# Altium PCB Bpod_Controller_v5.PcbDoc
Units mm, origin at the board's own origin, x right, y up, seen from the top; angles counter-clockwise.
Board outline 222.25 x 73.66 mm, 4 copper layers (Top Side, Inner Layer 1, Inner Layer 2, Bottom Side), stack 1.59 mm thick; 28 components, 56 nets, 210 pads, 9 vias.
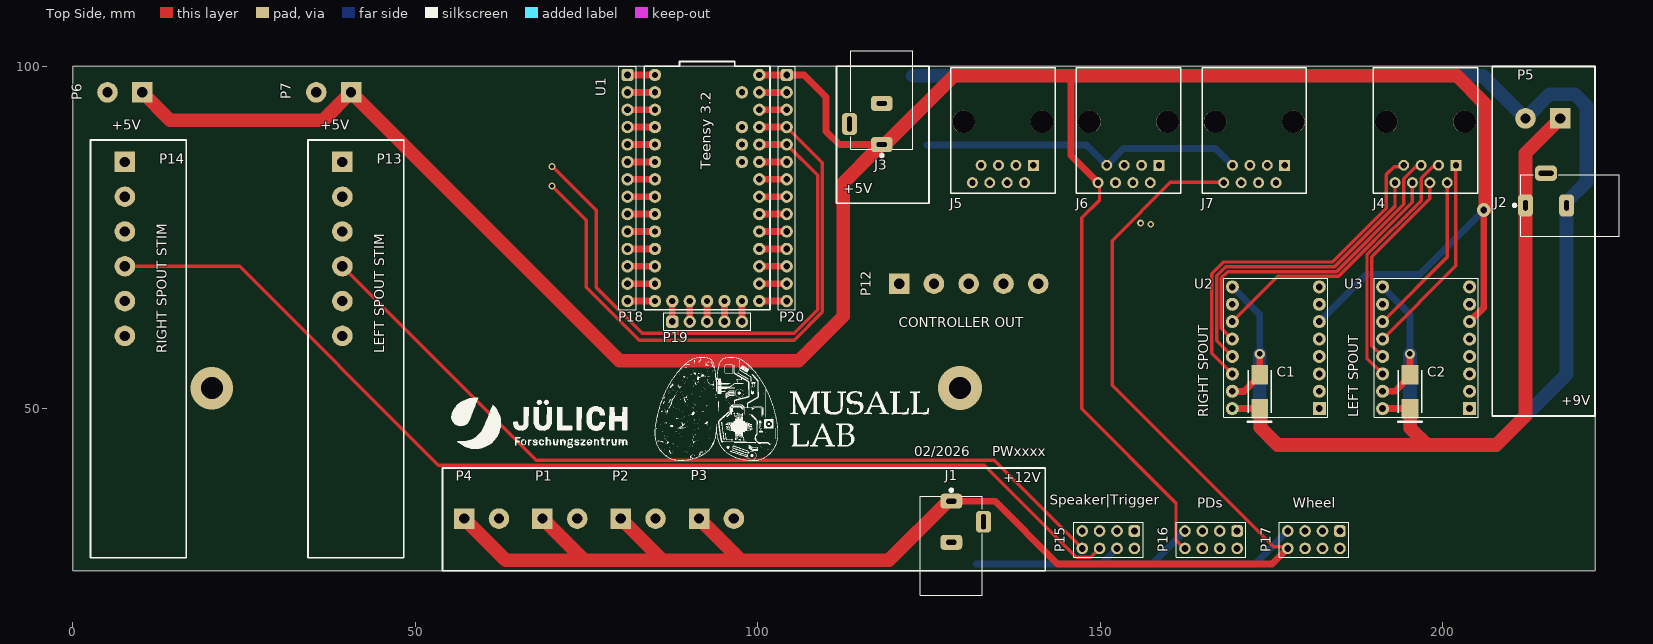
[diagram p0: Top Side view]
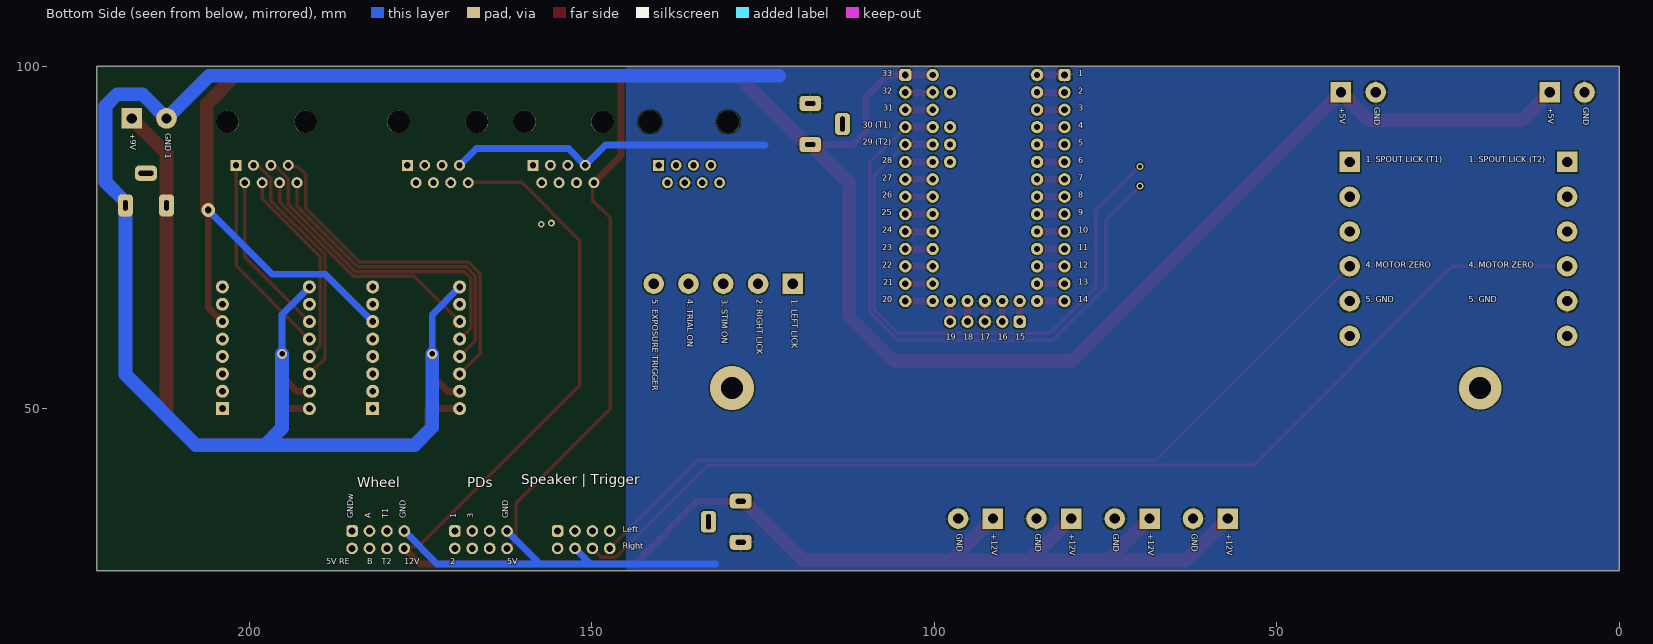
[diagram p1: Bottom Side view, seen from below]
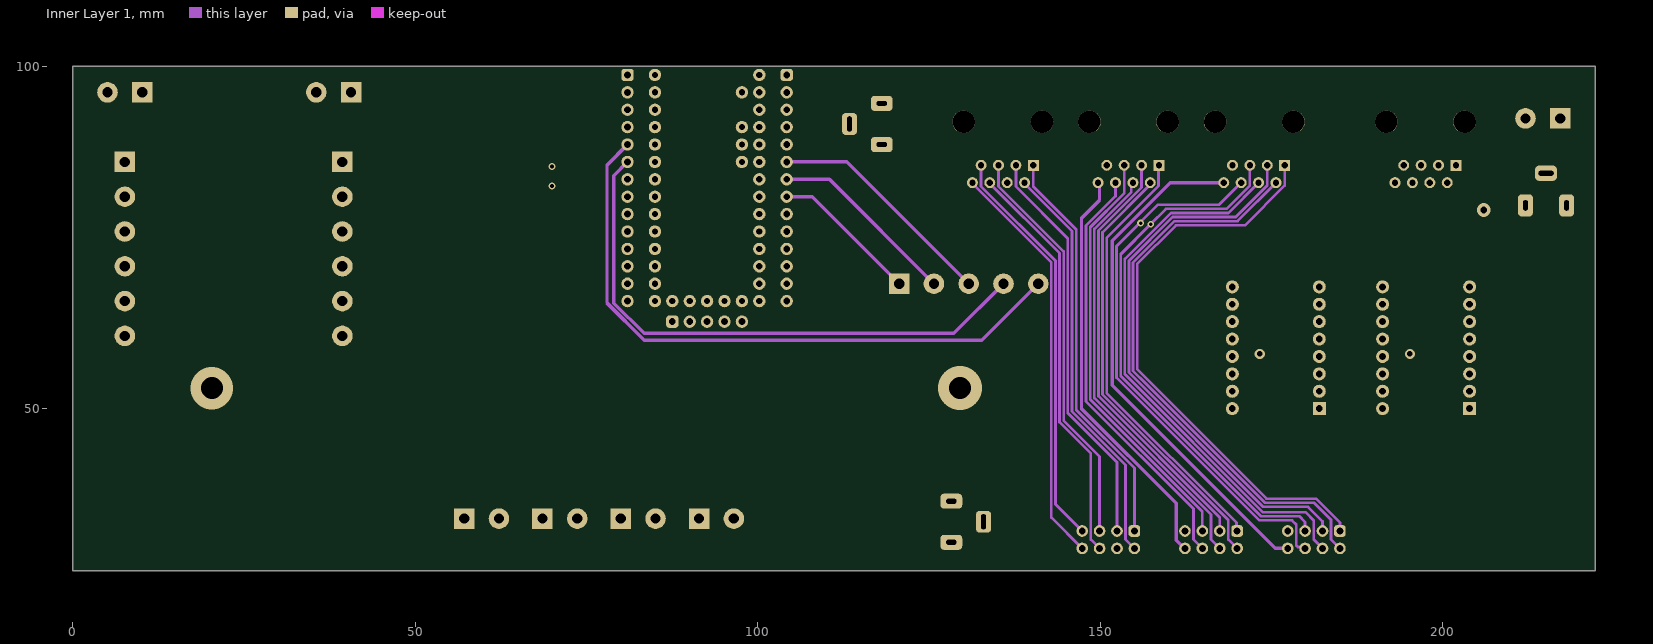
[diagram p2: Inner Layer 1]
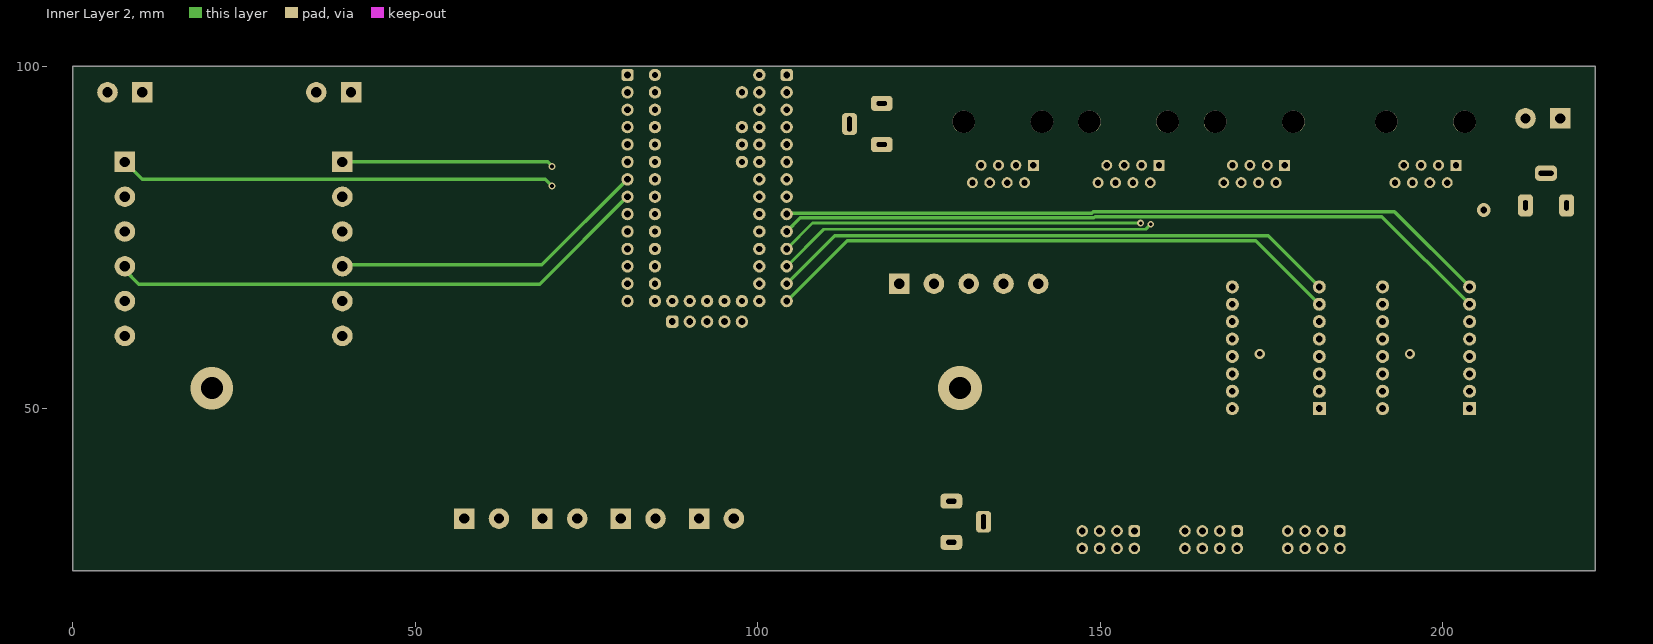
[diagram p3: Inner Layer 2]
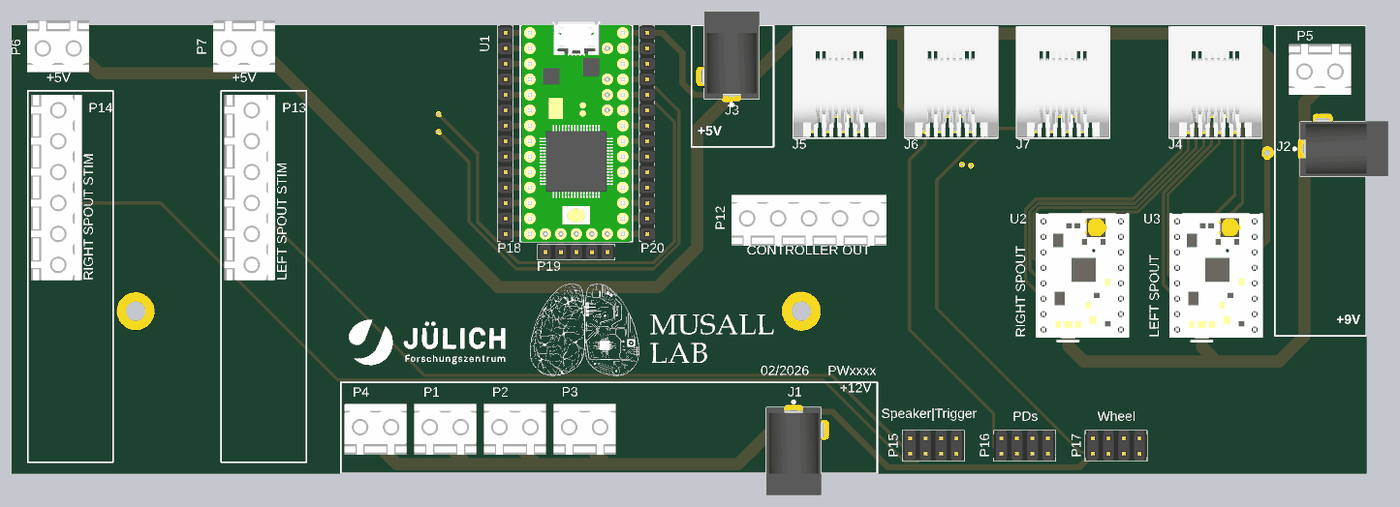
[diagram p4: 3D render of the assembled board from above, using the file's embedded part models]

## Layer stack, top to bottom
Top Solder: solder mask 0.015, WE-SM-0001, Dk 3.5
Top Side: signal copper 0.035
Dielectric 1: prepreg 0.37, WE-PP-0013, Dk 4.5
Inner Layer 1: signal copper 0.035
Core 1: core 0.71, WE-CO-0014, Dk 4.7
Inner Layer 2: signal copper 0.035
Dielectric 2: prepreg 0.37, WE-PP-0013, Dk 4.5
Bottom Side: signal copper 0.035
Bottom Solder: solder mask 0.015, WE-SM-0001, Dk 3.5

## Board outline
0,26.34 0,100 222.25,100 222.25,26.34

## Design rules (kind name [scope] priority, off if disabled: settings)
AssemblyTestPointUsage [All] p1: isadvanced=TRUE
AssemblyTestpoint [All] p1: isadvanced=TRUE testpointundercomponent=TRUE minsize=1.016 maxsize=2.54 preferedsize=1.524 minholesize=0 maxholesize=1.016 preferedholesize=0.813 testpointgrid=0.025 usegrid=TRUE gridtolerance=0 allowsidetop=TRUE allowsidebottom=TRUE
Clearance Clearance_1 [(ExistsOnLayer('Inner Layer 1') Or ExistsOnLayer('Inner Layer 2')) vs (ExistsOnLayer('Inner Layer 1') Or ExistsOnLayer('Inner Layer 2'))] p1: gap=0.2 ignorepadtopadclearanceinfootprint=FALSE sourcerule=41 cellrowname=All cellrowtype=0 cellcolname=All cellcoltype=0 innerlayers=TRUE
Clearance Clearance_2 [(ExistsOnLayer('Top Side') Or ExistsOnLayer('Bottom Side')) vs (ExistsOnLayer('Top Side') Or ExistsOnLayer('Bottom Side'))] p2: gap=0.2 ignorepadtopadclearanceinfootprint=FALSE sourcerule=41 cellrowname=All cellrowtype=0 cellcolname=All cellcoltype=0 outerlayers=TRUE
Clearance [All] p3: gap=0.254 ignorepadtopadclearanceinfootprint=FALSE ismatrix=TRUE
ComponentClearance [All] p1: isadvanced=TRUE gap=0.254 collisioncheckmode=3 verticalgap=0.254 showdistances=FALSE
DiffPairsRouting [All] p1: maxlimit=0.5 minlimit=0.5 mostfreqgap=0.5 toplayer_minwidth=0.381 toplayer_maxwidth=0.381 toplayer_prefwidth=0.381 midlayer1_minwidth=0.381 midlayer1_maxwidth=0.381 midlayer1_prefwidth=0.381 midlayer2_minwidth=0.381 midlayer2_maxwidth=0.381 midlayer2_prefwidth=0.381 bottomlayer_minwidth=0.381 bottomlayer_maxwidth=0.381 bottomlayer_prefwidth=0.381 maxuncoupledlength=12.7
FabricationTestPointUsage [All] p1: isadvanced=TRUE valid=0 allowmultiple=FALSE
FabricationTestpoint [All] p1: isadvanced=TRUE side=3 testpointundercomponent=TRUE minsize=1.016 maxsize=2.54 preferedsize=1.524 minholesize=0 maxholesize=1.016 preferedholesize=0.813 testpointgrid=0.025 allowsidetop=TRUE allowsidebottom=TRUE usegrid=TRUE gridtolerance=0
FanoutControl Fanout_BGA [IsBGA] p1: isadvanced=TRUE bgadir=Out bgaviamode=Centered fanoutstyle=Auto fanoutdirection=Alternating viagrid=0.025 // Fanout_BGA (Default Rule)
FanoutControl Fanout_LCC [IsLCC] p2: isadvanced=TRUE bgadir=Out bgaviamode=Centered fanoutstyle=Auto fanoutdirection=Alternating viagrid=0.025 // Fanout_LCC (Default Rule)
FanoutControl Fanout_SOIC [IsSOIC] p3: isadvanced=TRUE bgadir=Out bgaviamode=Centered fanoutstyle=Auto fanoutdirection=Alternating viagrid=0.025 // Fanout_SOIC (Default Rule)
FanoutControl Fanout_Small [(CompPinCount < 5)] p4: isadvanced=TRUE bgadir=Out bgaviamode=Centered fanoutstyle=Auto fanoutdirection=OutThenIn viagrid=0.025 // Fanout_Small (Default Rule)
FanoutControl Fanout_Default [All] p5: isadvanced=TRUE bgadir=Out bgaviamode=Centered fanoutstyle=Auto fanoutdirection=Alternating viagrid=0.025 // Fanout_Default (Default Rule)
Height [All] p1: isadvanced=TRUE minheight=0 maxheight=25.4 prefheight=12.7
HoleSize [All] p1: isadvanced=TRUE absolutevalues=TRUE maxlimit=5 minlimit=0.05 maxpercent=80.000 minpercent=20.000
HoleToHoleClearance [All] p1: isadvanced=TRUE gap=0.2 allowstackedmicrovias=TRUE
LayerPairs [All] p1: isadvanced=TRUE enforce=TRUE
MinimumSolderMaskSliver [All] p1: isadvanced=TRUE minsoldermaskwidth=0.2
NetAntennae [All] p1: isadvanced=TRUE netantennaetolerance=0
PasteMaskExpansion [All] p1: isadvanced=TRUE expansion=0
PlaneClearance [All] p1: isadvanced=TRUE clearance=0.508
PlaneConnect [All] p1: isadvanced=TRUE planeconnectstyle=Relief reliefexpansion=0.508 reliefentries=4 reliefconductorwidth=0.254 reliefairgap=0.254
PolygonConnect [All] p1: connectstyle=Relief reliefconductorwidth=0.3 reliefentries=4 polygonreliefangle="90 Angle" airgapwidth=0.3
RoutingCorners [All] p1: isadvanced=TRUE cornerstyle=45-Degree minsetback=2.54 maxsetback=2.54
RoutingPriority [All] p1: isadvanced=TRUE routingpriority=0
RoutingVias RoutingViaStyle_1 [All] p1: isadvanced=TRUE holewidth=0.8 width=1.6 viastyle="Through Hole" minholewidth=0.5 minwidth=0.8 maxholewidth=4 maxwidth=5
RoutingVias [All] p2: holewidth=0.8 width=1.6 viastyle="Through Hole" minholewidth=0.8 minwidth=1.6 maxholewidth=0.8 maxwidth=1.6
ShortCircuit [All] p1: isadvanced=TRUE allowed=FALSE
SilkToSilkClearance [All] p1: isadvanced=TRUE silktosilkclearance=0.1
SilkToSolderMaskClearance [IsPad] p1: isadvanced=TRUE minsilkscreentomaskgap=0.1 clearancetoexposedcopper=TRUE
SolderMaskExpansion [All] p1: isadvanced=TRUE expansion=0.102 istentingtop=FALSE
SupplyNets "Schematic Supply Nets_3" [InNet('+12V')] p1: isadvanced=TRUE voltage=0.000
SupplyNets "Schematic Supply Nets_2" [InNet('+9V')] p2: isadvanced=TRUE voltage=0.000
SupplyNets "Schematic Supply Nets_1" [InNet('+5V')] p3: isadvanced=TRUE voltage=0.000
SupplyNets "Schematic Supply Nets" [InNet('GND')] p4: isadvanced=TRUE voltage=0.000
UnRoutedNet [All] p1: isadvanced=TRUE
UnpouredPolygon [All] p1: isadvanced=TRUE
Width [All] p1: maxlimit=5 minlimit=0.2 preferedwidth=0.5 minimp=50.000000 maximp=50.000000 favimp=50.000000
3 further rules are at their usual default settings.

## Components (designator, comment, footprint, x,y, rotation, side; value= is the part's Value field where it differs from the comment)
C1 "TAJC107K016RNJ" AVX-TAJ-C-2_M 173.291,52.485 r90 top locked value=100µF
C2 "TAJC107K016RNJ" AVX-TAJ-C-2_M 195.231,52.485 r90 top locked value=100µF
J1 "PJ-102AH" CUI_PJ-102AH 128.271,30 r270 top locked
J2 "PJ-102AH" CUI_PJ-102AH 218.591,79.68 r0 top locked
J3 "PJ-102AH" CUI_PJ-102AH 118.111,95.07 r90 top locked
J4 "5569118-1" 5569118-1-Footprint-1 203.206,91.89 r180 top
J5 "5569118-1" 5569118-1-Footprint-1 141.506,91.89 r180 top
J6 "5569118-1" 5569118-1-Footprint-1 159.856,91.89 r180 top
J7 "5569118-1" 5569118-1-Footprint-1 178.206,91.89 r180 top
P1 "282825-2" 282825-4-Footprint-1#1 68.581,33.96 r90 top locked
P2 "282825-2" 282825-4-Footprint-1#1 80.011,33.96 r90 top locked
P3 "282825-2" 282825-4-Footprint-1#1 91.441,33.96 r90 top locked
P4 "282825-2" 282825-4-Footprint-1#1 57.151,33.96 r90 top locked
P5 "282825-2" 282825-4-Footprint-1#1 217.171,92.38 r270 top locked
P6 "282825-2" 282825-4-Footprint-1#1 10.16,96.19 r270 top locked
P7 "282825-2" 282825-4-Footprint-1#1 40.641,96.19 r270 top locked
P12 "282825-5" 282825-4-Footprint-1#2 120.651,68.25 r90 top locked
P13 "282825-6" 282825-4-Footprint-1#3 39.371,86.03 r0 top locked
P14 "282825-6" 282825-4-Footprint-1#3 7.621,86.03 r0 top locked
P15 "SL 2 025 8 G" "SL 2 025 2 G-Footprint-1" 155,32.15 r270 top
P16 "SL 2 025 8 G" "SL 2 025 2 G-Footprint-1" 170,32.15 r270 top
P17 "SL 2 025 8 G" "SL 2 025 2 G-Footprint-1" 185,32.15 r270 top
P18 "SL_1_025_14_ G" "SL_1_025_14_ G" 81,98.73 r0 top
P19 "SL_1_025_5_ G" "SL_1_025_5_ G" 87.54,62.71 r90 top
P20 "SL_1_025_14_ G" "SL_1_025_14_ G" 104.24,98.73 r0 top
U1 "Teensy 3.2" "New footprint 1" 85,98.73 r0 top locked
U2 "DRV8834" "DRV8825 STEPPER MOTOR DRIVER CARRIER-Footprint-1" 181.991,50.01 r180 top locked
U3 "DRV8834" "DRV8825 STEPPER MOTOR DRIVER CARRIER-Footprint-1" 203.931,50.01 r180 top locked

## Footprints (in the part's own frame and the unit in brackets; to place one, negate y for a bottom-side part, rotate by r counter-clockwise, add the part's x,y. Pads: shape width x height; smd on the part's side, far side on the other; paste and mask are expansions set on the pad)
282825-4-Footprint-1#1 [mm]
  rect 3x3 hole 1.5 paste-2539.97: 1(0,0)
  round 3 hole 1.5 paste-2539.97: 2(0,-5.08)
  body extent -4.5,-7.62 3.85,2.54, height 12
282825-4-Footprint-1#2 [mm]
  rect 3x3 hole 1.5 paste-2539.97: 1(0,0)
  round 3 hole 1.5 paste-2539.97: 2(0,-5.08) 3(0,-10.16) 4(0,-15.24) 5(0,-20.32)
  body extent -4.5,-22.86 3.85,2.54, height 12
282825-4-Footprint-1#3 [mm]
  rect 3x3 hole 1.5 paste-2539.97: 1(0,0)
  round 3 hole 1.5 paste-2539.97: 2(0,-5.08) 3(0,-10.16) 4(0,-15.24) 5(0,-20.32) 6(0,-25.4)
  body extent -4.5,-27.94 3.85,2.54, height 12
5569118-1-Footprint-1 [mm]
  rect 1.6x1.6 hole 0.9: 1(1.27,6.35)
  round 1.6 hole 0.9: 2(2.54,8.89) 3(3.81,6.35) 4(5.08,8.89) 5(6.35,6.35) 6(7.62,8.89) 7(8.89,6.35) 8(10.16,8.89)
  round 3.3 hole 3.3: X(0,0) Y(11.43,0)
  silkscreen extent -1.91,-7.87 13.33,10.42, body extent -1.91,-8 13.33,10.26, height 12.6
AVX-TAJ-C-2_M [mm] "Molded Capacitor, 2-Leads, Body 6.2x3.4mm, IPC Low Density"
  rect 2.85x2.45 smd: 1(-2.475,0) 2(2.475,0)
  silkscreen extent -4.4,-1.7 3.1,1.7, body extent -3.32,-1.7 3.32,1.7, height 2.8
CUI_PJ-102AH [mm]
  rrect50% 2.2x3.2 hole 0.7 slot 1.5 at 90 deg: 1(-6.5,0) 2(-0.5,0)
  rrect50% 3.2x2.2 hole 0.7 slot 2.2 at 0 deg: 3(-3.5,4.7)
  silkscreen extent -8.3,-4.5 7.2,4.5, body extent -7.2,-4.5 7.2,4.9, height 11
"DRV8825 STEPPER MOTOR DRIVER CARRIER-Footprint-1" [mm]
  rect 1.9x1.9 hole 1: 1(0,0)
  round 1.9 hole 1: 2(0,-2.54) 3(0,-5.08) 4(0,-7.62) 5(0,-10.16) 6(0,-12.7) 7(0,-15.24) 8(0,-17.78) 9(12.7,-17.78) 10(12.7,-15.24) 11(12.7,-12.7) 12(12.7,-10.16) 13(12.7,-7.62) 14(12.7,-5.08) 15(12.7,-2.54) 16(12.7,0)
  silkscreen extent -1.27,-19.05 13.93,1.27, body extent -1.25,-19.05 13.99,1.28, height 13.72
"New footprint 1" [mm]
  round 1.8 hole 0.9 paste-2539.97: 1(0,0) 2(0,-2.54) 3(0,-5.08) 4(0,-7.62) 5(0,-10.16) 6(0,-12.7) 7(0,-15.24) 8(0,-17.78) 9(0,-20.32) 10(0,-22.86) 11(0,-25.4) 12(0,-27.94) 13(0,-30.48) 14(0,-33.02) 15(2.54,-33.02) 16(5.08,-33.02) 17(7.62,-33.02) 18(10.16,-33.02) 19(12.7,-33.02) 20(15.24,-33.02) 21(15.24,-30.48) 22(15.24,-27.94) 23(15.24,-25.4) 24(15.24,-22.86) 25(15.24,-20.32) 26(15.24,-17.78) 27(15.24,-15.24) 28(15.24,-12.7) 29(15.24,-10.16) 30(15.24,-7.62) 31(15.24,-5.08) 32(15.24,-2.54) 33(15.24,0) 34(12.7,-2.54) 35(12.7,-7.62) 36(12.7,-10.16) 37(12.7,-12.7)
  silkscreen extent -1.57,-34.27 16.81,1.95, body extent -1.27,-34.29 16.51,1.97, height 14.85
"SL 2 025 2 G-Footprint-1" [mm]
  rrect50% 1.7x1.7 hole 1: 1(0,0)
  round 1.7 hole 1: 2(2.54,0) 3(0,-2.54) 4(2.54,-2.54) 5(0,-5.08) 6(2.54,-5.08) 7(0,-7.62) 8(2.54,-7.62)
  silkscreen extent -1.27,-8.89 3.81,1.27, body extent -1.23,-8.89 3.77,1.27, height 8.2
"SL_1_025_5_ G" [mm]
  rrect50% 1.8x1.8 hole 1: 1(0,0)
  round 1.8 hole 1: 2(0,-2.54) 3(0,-5.08) 4(0,-7.62) 5(0,-10.16)
  silkscreen extent -1.27,-11.43 1.27,1.27, body extent -1.25,-11.43 1.25,1.27, height 9.8
"SL_1_025_14_ G" [mm]
  rrect50% 1.8x1.8 hole 1: 1(0,0)
  round 1.8 hole 1: 2(0,-2.54) 3(0,-5.08) 4(0,-7.62) 5(0,-10.16) 6(0,-12.7) 7(0,-15.24) 8(0,-17.78) 9(0,-20.32) 10(0,-22.86) 11(0,-25.4) 12(0,-27.94) 13(0,-30.48) 14(0,-33.02)
  silkscreen extent -1.27,-34.29 1.27,1.27, body extent -1.25,-34.29 1.25,1.27, height 9.8

## Part data
C1 C2: library part CMP-001-00046-9, "Standard Tantalum, 100 uF, +/- 10%, 16 V, -55 to 125 degC, 2312 (6032 Metric), RoHS, Tape and Reel", Capacitor Type=Tantalum, Case/Package=2412, Manufacturer=AVX, Max Operating Temperature=125°C, Min Operating Temperature=-55°C, Package Description="2-Pin Surface Mount Device, Body 6 x 3.25 mm", Package Quantity=500, Package Reference=TAJ-C-2, Resistance=1Ohm, Tolerance=10%, Voltage Rating=16V, Datasheet URL=http://datasheets.avx.com/TAJ.pdf, Datasheet Version=Feb-16, ESR=1Ohm, Manufacturer URL=http://www.avx.com/, Mounting Technology=SM, Packaging=TapeandReel, RoHS Compliant=True
J1 J2 J3: library part CMP-00027-00002-5, "12V, 2.5A, 2mm Dia", Mounting Technology=Board, Pins=3, RoHS Compliant=Yes, user=IBI-TAE
J4 J5 J6 J7: library part CMP-002-00096-6, "Telecom and Datacom Connector, 8 Contact(s), Female, Right Angle, Solder Terminal, Locking, Jack", Case/Package=RJ45, Max Operating Temperature=85°C, Min Operating Temperature=-40°C, Connector Type="TELECOM AND DATACOM CONNECTOR", Mounting Technology=Panel,Board, Pins=8, RoHS Compliant=Yes, user=IBI-TAE
P1 P2 P3 P4 P5 P6 P7: library part CMP-002-00093-3, "Strip Terminal Block, 15A, 1 Row(s), 1 Deck(s)", Max Current Rating=15A, Voltage Rating=300V, Connector Type="Pluggable Terminal Block", Gender=male, Mounting Technology=Board, Pins=4, RoHS Compliant=Yes, user=IBI-TAE
P12: library part CMP-002-00091-4, "Strip Terminal Block, 15A, 1 Row(s), 1 Deck(s)", Max Current Rating=15A, Voltage Rating=300V, Connector Type="Pluggable Terminal Block", Gender=male, Mounting Technology=Board, Pins=5, RoHS Compliant=Yes, user=IBI-TAE
P13 P14: library part CMP-002-00092-4, "Strip Terminal Block, 15A, 1 Row(s), 1 Deck(s)", Max Current Rating=15A, Voltage Rating=300V, Connector Type="Pluggable Terminal Block", Gender=male, Mounting Technology=Board, Pins=6, RoHS Compliant=Yes, user=IBI-TAE
P15 P16 P17: library part CMP-002-00101-2, "Fischer  SL 2 025 8 G, Stiftleiste, 2 Reiheb, 8 Pole, vergoldet", Max Current Rating=3A, Voltage Rating=300V, Connector Type="BOARD CONNECTOR", Contact Finish - Mating=GOLD, Contact Finish - Termination=GOLD, Contact Gender=Male, Gender=male, Mounting Style=STRAIGHT, Mounting Technology=Board, Number of Contacts=8, Number of Rows Loaded=2, Pins=6, RoHS Compliant=Yes, Terminal Pitch=2.54mm, user=IBI-TAE
P18 P20: library part CMP-002-00107-2, "Fischer SL_1_025_14_ G, Stiftleiste, 1 Reiheb, 14 Pole, vergoldet", Max Current Rating=3A, Voltage Rating=300V, Connector Type="BOARD CONNECTOR", Contact Finish - Mating=GOLD, Contact Finish - Termination=GOLD, Contact Gender=Male, Gender=male, Mounting Style=STRAIGHT, Mounting Technology=Board, Number of Contacts=14, Number of Rows Loaded=1, Pins=14, RoHS Compliant=Yes, Terminal Pitch=2.54mm, user=IBI-TAE
P19: library part CMP-002-00106-1, "Fischer SL_1_025_5_ G, Stiftleiste, 1 Reiheb, 5 Pole, vergoldet", Max Current Rating=3A, Voltage Rating=300V, Connector Type="BOARD CONNECTOR", Contact Finish - Mating=GOLD, Contact Finish - Termination=GOLD, Contact Gender=Male, Gender=male, Mounting Style=STRAIGHT, Mounting Technology=Board, Number of Contacts=5, Number of Rows Loaded=1, Pins=5, RoHS Compliant=Yes, Terminal Pitch=2.54mm, user=IBI-TAE
U1: library part CMP-00000-6, "Development Boards & Kits, ARM Teensy 3.2 and header", user=IBI-TAE
U2 U3: library part CMP-00024-00007-1, "DRV8834 Low-Voltage Stepper Motor Driver Carrier", Continuous current per phase=1,5A, Max current per phase=2A, Max Supply Voltage=10,8V, Min Supply Voltage=2,5V, Pins=16, user=IBI-TAE, website=https://www.pololu.com/product/2134

## Via types
v1: diameter 1.5, hole 0.8, Top Side to Bottom Side, 2 vias
v2: diameter 1, hole 0.5, Top Side to Bottom Side, 2 vias
v3: diameter 1, hole 0.6, Top Side to Bottom Side, 2 vias
v4: diameter 2, hole 1, Top Side to Bottom Side, 1 vias
v5: diameter 6.4, hole 3.2, Top Side to Bottom Side, 1 vias
v6: diameter 6.2, hole 3.2, Top Side to Bottom Side, 1 vias

## Nets (pads, with @x,y where several pads share a name; then routed paths per layer and width w, separated by ;. In a path a pad name is that pad's centre, name@x,y a point inside that pad or via, vN(x,y) a via of type N, cw(c..) or ccw(c..) an arc to the next point about the centre after c; other vN are vias at no path point)
+5V: J3.1 J6.8 P6.1 P7.1 P16.8 P20.1 U1.33 U2.6 U3.6 | length 472.6
  Top Side w0.5: J6.8 149.9,82.796 149.9,80.45 147.3,77.85 147.3,49.975 161.075,36.2 161.075,30.8 162,29.875 P16.8@162.325,29.875
  Top Side w1: U1.33 P20.1 106.77,98.73 110,95.5 110,90.5 111.93,88.57 J3.1@117.611,88.57 ; J3.1 J3.1@118.611,88.57 ; 145.75,98.6 145.75,86.946 J6.8 ; U3.6 206,64.779 ; 206,64.75 206,64.779 ; v4(206,79) 206,64.779
  Top Side w2: P6.1 14.25,92.1 36.551,92.1 P7.1 79.831,57 106,57 112.5,63.5 112.5,82.959 117.511,87.97 117.511,88.47 J3.1@117.611,88.57 ; J3.1@118.611,88.57 128.641,98.6 145.75,98.6 202.1,98.6 206.2,94.5 206.2,79.2 v4(206,79)
  Inner Layer 1 w0.5: J6.8 149.905,82.791 149.905,80.466 147.275,77.836 147.275,49.99 161.08,36.185 161.08,30.804 162.274,29.61 P16.8
  Bottom Side w1: U2.6 188.906,69.625 196.625,69.625 v4(206,79)
+9V: C1.1 C2.1 J2.1 P5.1 U2.16 U3.16 | length 103.4
  Top Side w1: U2.16 173.091,50.01 C1.1@173.291,49.81 ; U3.16 C2.1@194.363,50.01
  Top Side w2: C1.1 173.399,49.902 173.399,47.226 175.925,44.7 197.725,44.7 ; C2.1 195.269,49.972 195.269,47.156 197.725,44.7 ; P5.1 212.091,87.3 J2.1 212.091,48.966 207.825,44.7 197.725,44.7
+12V: J1.1 J7.8 P1.1 P2.1 P3.1 P4.1 P17.8 | length 310.5
  Top Side w0.5: J7.8 167.996,83.05 160.25,83.05 151.75,74.55 151.75,53.425 175.335,29.84 177.15,29.84 P17.8
  Top Side w1: J1.1 J1.1@128.744,36.5 ; J1.1@129.34,37.096 J1.1@128.744,36.5 ; P17.8 175.12,27.35 143.8,27.35 134.65,36.5 J1.1@128.744,36.5
  Top Side w2: P4.1 63.211,27.9 74.641,27.9 ; P1.1 74.641,27.9 ; P2.1 86.071,27.9 ; P3.1 97.501,27.9 ; J1.1 127.771,36.5 119.171,27.9 97.7,27.9 97.501,27.9 ; 74.641,27.9 75.1,27.9 86.071,27.9 ; 86.071,27.9 86.9,27.9 97.501,27.9
  Inner Layer 1 w0.5: J7.8 160.208,83 151.75,74.542 151.75,53.415 175.555,29.61 P17.8
GND: C1.2 C2.2 J1.2 J2.2 J3.2 J5.4 J6.7 J7.7 P1.2 P2.2 P3.2 P4.2 P5.2 P6.2 P7.2 P13.5 P14.5 P15.4 P16.7 P17.7 P18.1 P19.3 P20.2 U1.1 U1.17 U1.32 U2.9 U2.15 U3.9 U3.15 | length 375.5
  Top Side w1: P18.1 U1.1 ; P19.3 U1.17 ; U1.32 P20.2 ; U2.15 169.341,52.5 171.031,52.5 173.291,54.76 C1.2 v1(173.291,58) ; U3.15 193.021,52.55 195.231,54.76 C2.2 v1(195.231,58)
  Inner Layer 1 w0.4: J5.4@136.426,82.859 J5.4
  Bottom Side w1: 124.681,88.5 148.006,88.5 J6.7 153.426,88 166.856,88 J7.7 ; J1.2 J1.2@128.771,30.5 ; 131.921,27.35 150.2,27.35 ; P15.4 150.2,27.35 ; P16.7 157.58,27.35 ; U2.9 173.291,63.79 v1(173.291,58) ; P17.7 172.58,27.35 157.58,27.35 ; U3.9 195.231,63.79 v1(195.231,58) ; 150.2,27.35 157.58,27.35
  Bottom Side w2: J3.2 J3.2@118.611,94.57 ; 122.632,98.592 205.879,98.592 P5.2 215.611,95.9 219.3,95.9 221,94.2 221,83.089 218.191,80.28 218.191,79.78 J2.2 218.091,54.991 207.775,44.675 197.75,44.675 ; v1(173.291,58) 173.291,47.284 175.9,44.675 197.75,44.675 ; v1(195.231,58) 195.231,47.194 197.75,44.675
NetJ4_1: J4.1 U3.12 | length 29.8
  Top Side w0.5: U3.12 201.936,70.875 J4.1
NetJ4_2: J4.2 U3.11 | length 24.2
  Top Side w0.5: U3.11 200.666,72.145 ; 200.666,72.175 J4.2
NetJ4_3: J4.3 U3.14 | length 36
  Top Side w0.5: 188.95,57.371 U3.14 ; 188.95,57.425 188.95,72.49 196.85,80.39 196.85,83.625 198.535,85.31 199.166,85.31 J4.3
NetJ4_4: J4.4 U3.13 | length 29.5
  Top Side w0.5: 189.675,59.175 189.675,59.186 ; U3.13 189.675,59.186 ; J4.4 198.126,80.651 189.675,72.2 189.675,59.186
NetJ4_5: J4.5 U2.12 | length 47.7
  Top Side w0.5: 167.7,61.761 U2.12 ; 167.7,61.8 167.7,69.095 168.63,70.025 184.505,70.025 194.3,79.82 194.3,83.55 196.08,85.33 196.646,85.33 J4.5
NetJ4_6: J4.6 U2.11 | length 36.4
  Top Side w0.5: U2.11 175.906,69.325 184.795,69.325 195.586,80.116 J4.6
NetJ4_7: J4.7 U2.14 | length 53.3
  Top Side w0.5: 166.3,58.081 U2.14 ; 166.3,58.1 166.3,69.675 168.05,71.425 183.925,71.425 191.796,79.296 191.796,84.196 192.93,85.33 194.106,85.33 J4.7
NetJ4_8: J4.8 U2.13 | length 46.4
  Top Side w0.5: 167,59.921 U2.13 ; 167,59.975 167,69.385 168.34,70.725 184.215,70.725 193.046,79.556 J4.8
NetJ5_1: J5.1 P15.1 | length 59.5
  Inner Layer 1 w0.4: J5.1 140.236,82.464 146.5,76.2 146.5,49.845 155,41.345 P15.1
NetJ5_2: J5.2 P15.2 | length 60
  Inner Layer 1 w0.4: J5.2 138.966,82.885 145.9,75.951 145.9,49.597 153.71,41.787 153.71,30.9 P15.2
NetJ5_3: J5.3 P15.3 | length 59.5
  Inner Layer 1 w0.4: J5.3 137.696,82.437 145.271,74.862 145.271,49.377 152.46,42.188 P15.3
NetJ5_5: J5.5 P15.5 | length 60.1
  Inner Layer 1 w0.4: J5.5 135.156,82.469 144.671,72.954 144.671,48.28 149.92,43.031 P15.5@149.92,31.546
NetJ5_6: J5.6 P14.4 P15.6 P18.8 U1.8 | length 304.5
  Top Side w0.5: P14.4 24.385,70.79 53.4,41.775 133.05,41.775 146.515,28.31 148.62,28.31 P15.6
  Top Side w1: P18.8 U1.8
  Inner Layer 1 w0.4: J5.6 133.886,82.89 144.071,72.706 144.071,48.032 148.635,43.467 148.635,30.895 P15.6
  Inner Layer 2 w0.5: P14.4 7.621,70.254 9.675,68.2 68.2,68.2 P18.8@81,81
NetJ5_7: J5.7 P15.7 | length 59.5
  Inner Layer 1 w0.4: J5.7 132.616,82.459 143.471,71.604 143.471,36.059 P15.7
NetJ5_8: J5.8 P13.4 P15.8 P18.7 U1.7 | length 236
  Top Side w0.5: P13.4 67.686,42.475 134.515,42.475 P15.8
  Top Side w1: P18.7 U1.7
  Inner Layer 1 w0.4: J5.8 131.346,82.88 142.871,71.356 142.871,34.119 P15.8
  Inner Layer 2 w0.5: P13.4 39.581,71 68.51,71 P18.7
NetJ6_1: J6.1 P16.1 | length 64.4
  Inner Layer 1 w0.4: J6.1 158.516,85.47 158.516,82.503 150.95,74.937 150.95,52.325 169.909,33.366 169.909,32.241 P16.1
NetJ6_2: J6.2 P16.2 | length 64.4
  Inner Layer 1 w0.4: J6.2 157.316,82.715 150.35,75.749 150.35,52.076 168.71,33.716 168.71,30.9 P16.2
NetJ6_3: J6.3 P16.3 | length 63.3
  Inner Layer 1 w0.4: J6.3 156.046,82.293 149.75,75.997 149.75,51.828 167.46,34.118 P16.3
NetJ6_4: J6.4 P16.4 | length 63.3
  Inner Layer 1 w0.4: J6.4 154.546,82.77 154.546,81.642 149.15,76.246 149.15,51.579 166.17,34.559 166.17,30.9 P16.4
NetJ6_5: J6.5 P16.5 | length 62.2
  Inner Layer 1 w0.4: J6.5 153.506,81.45 148.55,76.494 148.55,51.331 164.92,34.961 P16.5
NetJ6_6: J6.6 P16.6 | length 62.2
  Inner Layer 1 w0.4: J6.6 152.236,81.029 147.95,76.743 147.95,51.082 163.63,35.402 163.63,30.9 P16.6
NetJ7_1: J7.1 P17.1 | length 84.7
  Inner Layer 1 w0.4: J7.1 176.936,82.573 171.138,76.775 161.075,76.775 155.4,71.1 155.4,55.775 174.3,36.875 181.5,36.875 185,33.375 P17.1
NetJ7_2: J7.2 P17.2 | length 84.1
  Inner Layer 1 w0.4: J7.2 175.666,82.994 170.047,77.375 160.826,77.375 154.8,71.349 154.8,70.35 154.8,55.526 156.65,53.676 174.051,36.275 175.268,36.275 181.225,36.275 183.71,33.79 183.71,30.9 P17.2
NetJ7_3: J7.3 P17.3 | length 82.7
  Inner Layer 1 w0.4: J7.3 174.396,82.573 169.798,77.975 160.578,77.975 154.2,71.597 154.2,55.278 173.803,35.675 180.35,35.675 182.46,33.565 P17.3
NetJ7_4: J7.4 P17.4 | length 82
  Inner Layer 1 w0.4: J7.4 173.126,82.994 168.707,78.575 160.329,78.575 153.6,71.846 153.6,55.029 173.729,34.9 179.95,34.9 181.2,33.65 181.2,30.87 P17.4
NetJ7_5: J7.5 P17.5 P20.12 U1.22 | length 140.5
  Top Side w1: U1.22 P20.12
  Inner Layer 1 w0.4: J7.5 171.856,82.573 168.458,79.175 159.625,79.175 v2(157.375,76.925) 153,72.55 153,54.781 173.481,34.3 179.075,34.3 179.92,33.455 P17.5
  Inner Layer 2 w0.4: P20.12 109.65,76.2 156.65,76.2 v2(157.375,76.925)
NetJ7_6: J7.6 P17.6 P20.11 U1.23 | length 138.1
  Top Side w1: U1.23 P20.11
  Inner Layer 1 w0.4: J7.6 170.586,82.994 167.38,79.788 158.463,79.788 152.4,73.725 152.4,54.532 173.232,33.7 178.025,33.7 178.63,33.095 178.63,30.039 178.864,29.805 179.725,29.805 P17.6
  Inner Layer 2 w0.4: P20.11 108.01,77.1 v2(155.9,77.1)
NetP12_1: P12.1 P20.8 U1.26 | length 25.7
  Top Side w1: U1.26 P20.8
  Inner Layer 1 w0.5: P20.8 104.251,80.939 107.962,80.939 P12.1
NetP12_2: P12.2 P20.7 U1.27 | length 31.8
  Top Side w1: U1.27 P20.7
  Inner Layer 1 w0.5: P20.7 110.491,83.49 P12.2
NetP12_3: P12.3 P20.6 U1.28 | length 37.9
  Top Side w1: U1.28 P20.6
  Inner Layer 1 w0.5: P20.6 113.031,86.03 P12.3
NetP12_4: P12.4 P18.6 U1.6 | length 87.2
  Top Side w1: P18.6 U1.6
  Inner Layer 1 w0.5: P18.6 79,84.03 79,65.425 83.425,61 128.641,61 P12.4
NetP12_5: P12.5 P18.5 U1.5 | length 97
  Top Side w1: P18.5 U1.5
  Inner Layer 1 w0.5: P18.5 78,85.57 78,65.435 83.435,60 132.721,60 P12.5
NetP13_1: P13.1 P20.5 U1.29 | length 117.8
  Top Side w0.5: v3(70,85.384) 76.425,78.959 76.425,67.7 83.125,61 105.325,61 108.75,64.425 108.75,84.06 P20.5
  Top Side w1: U1.29 P20.5
  Inner Layer 2 w0.5: P13.1 69.354,86.03 v3(70,85.384)
NetP14_1: P14.1 P20.4 U1.30 | length 153.2
  Top Side w0.5: v3(70,82.5) 74.975,77.525 74.975,67.725 82.7,60 105.325,60 109.45,64.125 109.45,85.9 P20.4
  Top Side w1: U1.30 P20.4
  Inner Layer 2 w0.5: P14.1 10.151,83.5 69,83.5 v3(70,82.5)
NetP18_2: P18.2 U1.2 | length 4
  Top Side w1: P18.2 U1.2
NetP18_3: P18.3 U1.3 | length 4
  Top Side w1: P18.3 U1.3
NetP18_4: P18.4 U1.4 | length 4
  Top Side w1: P18.4 U1.4
NetP18_9: P18.9 U1.9 | length 4
  Top Side w1: P18.9 U1.9
NetP18_10: P18.10 U1.10 | length 4
  Top Side w1: P18.10 U1.10
NetP18_11: P18.11 U1.11 | length 4
  Top Side w1: P18.11 U1.11
NetP18_12: P18.12 U1.12 | length 4
  Top Side w1: P18.12 U1.12
NetP18_13: P18.13 U1.13 | length 4
  Top Side w1: P18.13 U1.13
NetP18_14: P18.14 U1.14 | length 4
  Top Side w1: P18.14 U1.14
NetP19_1: P19.1 U1.15 | length 3
  Top Side w1: P19.1 U1.15
NetP19_2: P19.2 U1.16 | length 3
  Top Side w1: P19.2 U1.16
NetP19_4: P19.4 U1.18 | length 3
  Top Side w1: P19.4 U1.18
NetP19_5: P19.5 U1.19 | length 3
  Top Side w1: P19.5 U1.19
NetP20_3: P20.3 U1.31 | length 4
  Top Side w1: U1.31 P20.3
NetP20_9: P20.9 U1.25 U3.8 | length 108.4
  Top Side w1: U1.25 P20.9
  Inner Layer 2 w0.5: P20.9 104.382,78.552 148.787,78.552 148.985,78.75 192.971,78.75 U3.8
NetP20_10: P20.10 U1.24 U3.7 | length 109.9
  Top Side w1: U1.24 P20.10
  Inner Layer 2 w0.5: P20.10 106.222,77.852 149.077,77.852 149.275,78.05 191.131,78.05 U3.7
NetP20_13: P20.13 U1.21 U2.8 | length 87.7
  Top Side w1: U1.21 P20.13
  Inner Layer 2 w0.5: P20.13 111.24,75.25 174.531,75.25 U2.8
NetP20_14: P20.14 U1.20 U2.7 | length 89.3
  Top Side w1: U1.20 P20.14
  Inner Layer 2 w0.5: P20.14 113.08,74.55 172.691,74.55 U2.7
pads on no net: J1.3 J2.3 J3.3 J4.X J4.Y J5.X J5.Y J6.X J6.Y J7.X J7.Y P13.2 P13.3 P13.6 P14.2 P14.3 P14.6 U1.34 U1.35 U1.36 U1.37 U2.1 U2.2 U2.3 U2.4 U2.5 U2.10 U3.1 U3.2 U3.3 U3.4 U3.5 U3.10
copper on no net:
  other v5: 129.541,53.01
  other v6: 20.321,53.01

## Polygon pours and split planes (outlines as drawn)
GND on Bottom Side "NONET_L-01_P-001" (solid, pour order 0): 0,100 145,100 145,26.34 0,26.34

## Silkscreen, mask and mechanical layers (free items; w line width, h text height)
Top Overlay:
  drawing of 175 lines, arcs and shapes, not listed
  text "+5V" at 5.671,90.212 h2.5
  text "+5V" at 36.152,90.212 h2.5
  text "+5V" at 112.506,80.965 h2.5
  text "CONTROLLER OUT" at 120.576,61.371 h2.5
  text "RIGHT SPOUT STIM" at 14.25,58.09 h2.5 r90
  text "LEFT SPOUT STIM" at 46,58.09 h2.5 r90
  text "+9V" at 217.303,49.972 h2.5
  text "RIGHT SPOUT" at 166.265,48.74 h2.5 r90
  text "LEFT SPOUT" at 188.205,48.74 h2.5 r90
  text "02/2026     PWxxxx" at 122.846,42.528 h2.5
  text "+12V" at 135.858,38.734 h2.5
  text "Speaker|Trigger" at 142.653,35.472 h2.5
  text "PDs" at 164.205,35.026 h2.5
  text "Wheel" at 178.113,35.026 h2.5
Bottom Overlay:
  text "1" at 79,98.248 h1.5
  text "33" at 107.616,98.256 h1.5
  text "2" at 79.001,95.708 h1.5
  text "32" at 107.606,95.716 h1.5
  text "GND" at 5.561,94 h1.5 r90
  text "+5V" at 10.633,94 h1.5 r90
  text "GND" at 36.042,94 h1.5 r90
  text "+5V" at 41.114,94 h1.5 r90
  text "3" at 79,93.176 h1.5
  text "31" at 107.43,93.176 h1.5
  text "30 (T1)" at 110.461,90.763 h1.5
  text "4" at 79,90.629 h1.5
  text "GND 1" at 212.572,90.19 h1.5 r90
  text "+9V" at 217.645,90.19 h1.5 r90
  text "29 (T2)" at 110.478,88.223 h1.5
  text "5" at 79,88.103 h1.5
  text "1. SPOUT LICK (T2)" at 22,85.682 h1.5
  text "1. SPOUT LICK (T1)" at 37,85.682 h1.5
  text "6" at 79,85.556 h1.5
  text "28" at 107.635,85.556 h1.5
  text "7" at 79,83.016 h1.5
  text "27" at 107.633,83.008 h1.5
  text "8" at 79,80.476 h1.5
  text "26" at 107.633,80.476 h1.5
  text "9" at 79,77.936 h1.5
  text "25" at 107.641,77.936 h1.5
  text "10" at 79,75.396 h1.5
  text "24" at 107.63,75.388 h1.5
  text "11" at 79,72.848 h1.5
  text "23" at 107.633,72.856 h1.5
  text "4. MOTOR ZERO" at 22,70.309 h1.5
  text "4. MOTOR ZERO" at 37,70.309 h1.5
  text "12" at 79,70.308 h1.5
  text "22" at 107.624,70.308 h1.5
  text "13" at 79,67.776 h1.5
  text "21" at 107.448,67.768 h1.5
  text "1. LEFT LICK" at 121.132,66 h1.5 r90
  text "2. RIGHT LICK" at 126.212,66.001 h1.5 r90
  text "3. STIM ON" at 131.292,66 h1.5 r90
  text "4. TRIAL ON" at 136.372,66 h1.5 r90
  text "5. EXPOSURE TRIGGER" at 141.452,66 h1.5 r90
  text "5. GND" at 22,65.229 h1.5
  text "5. GND" at 37,65.229 h1.5
  text "14" at 79,65.228 h1.5
  text "20" at 107.63,65.236 h1.5
  text "15" at 88.187,59.746 h1.5
  text "16" at 90.723,59.746 h1.5
  text "17" at 93.263,59.746 h1.5
  text "18" at 95.804,59.746 h1.5
  text "19" at 98.344,59.746 h1.5
  text "Speaker | Trigger" at 160.332,38.472 h2.5
  text "PDs" at 168.175,38.026 h2.5
  text "Wheel" at 184.267,38.026 h2.5
  text "GND" at 161.899,34 h1.5 r270
  text "3" at 166.986,34 h1.5 r270
  text "1" at 169.518,34 h1.5 r270
  text "GND" at 176.899,34 h1.5 r270
  text "T1" at 179.438,34 h1.5 r270
  text "A" at 181.979,34 h1.5 r270
  text "GNDw" at 184.519,34 h1.5 r270
  text "+12V" at 57.633,31.77 h1.5 r90
  text "GND" at 62.712,31.77 h1.5 r90
  text "+12V" at 69.063,31.77 h1.5 r90
  text "GND" at 74.142,31.77 h1.5 r90
  text "+12V" at 80.493,31.77 h1.5 r90
  text "GND" at 85.572,31.77 h1.5 r90
  text "+12V" at 91.923,31.77 h1.5 r90
  text "GND" at 97.002,31.77 h1.5 r90
  text "Left" at 145.5,31.669 h1.5
  text "Right" at 145.5,29.271 h1.5
  text "5V" at 162.38,27.016 h1.5
  text "5V RE" at 188.752,27.016 h1.5
  text "2" at 170.637,27 h1.5
  text "12V" at 177.38,27 h1.5
  text "T2" at 180.652,27 h1.5
  text "B" at 182.823,27 h1.5
Mechanical 1:
  the board outline again, w0.1